# Altium PCB floorctrl.PcbDoc
Units mm, origin at the board's own origin, x right, y up, seen from the top; angles counter-clockwise.
Board outline 60 x 60 mm, 2 copper layers (Top Layer, Bottom Layer), stack 1.571 mm thick; 22 components, 32 nets, 112 pads, 0 vias.
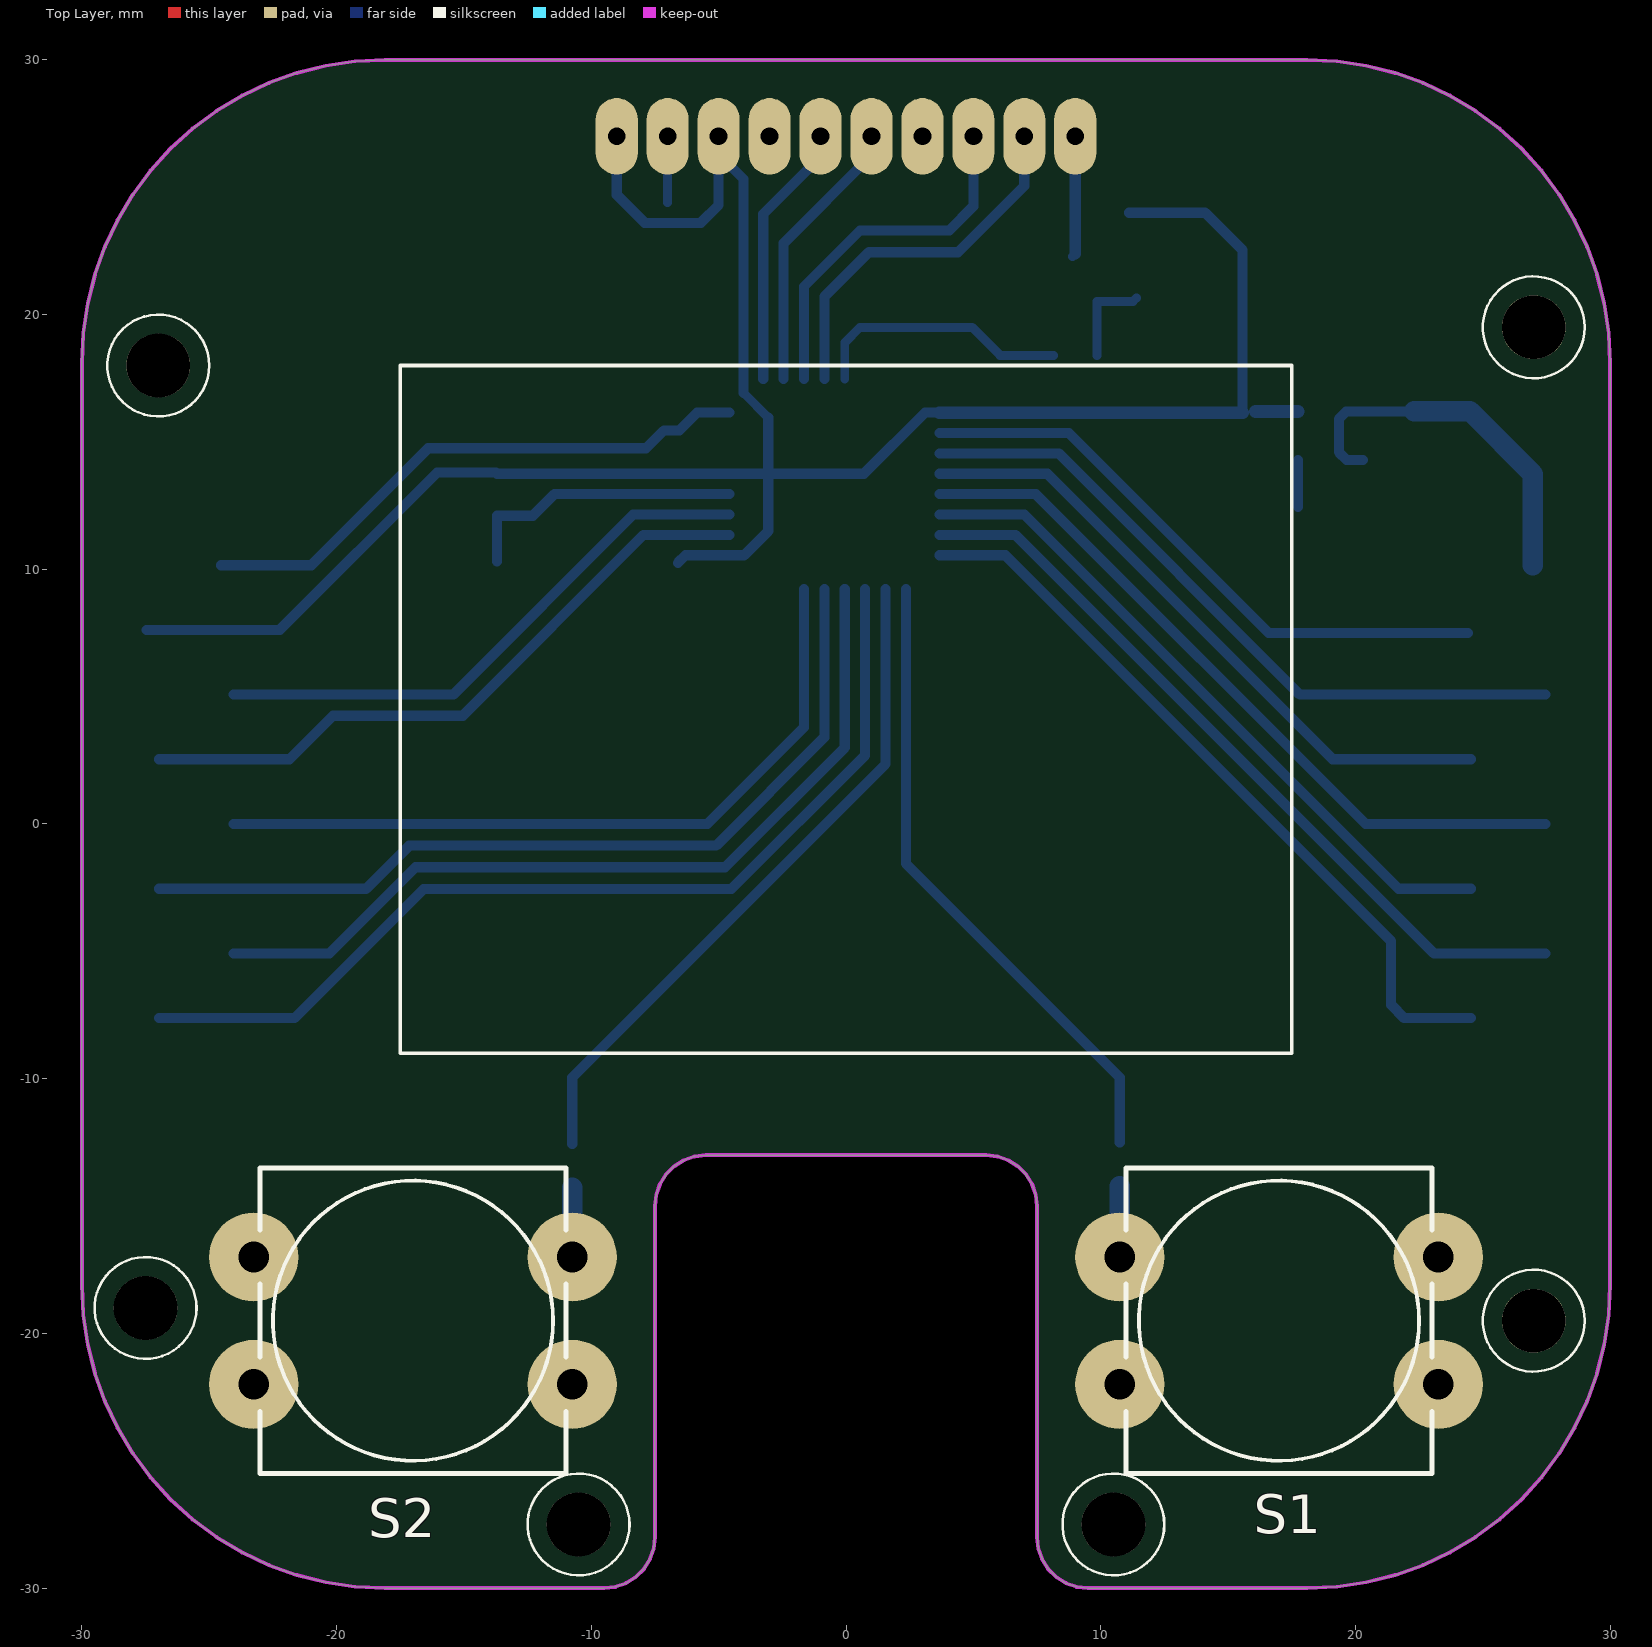
[diagram p0: Top Layer view]
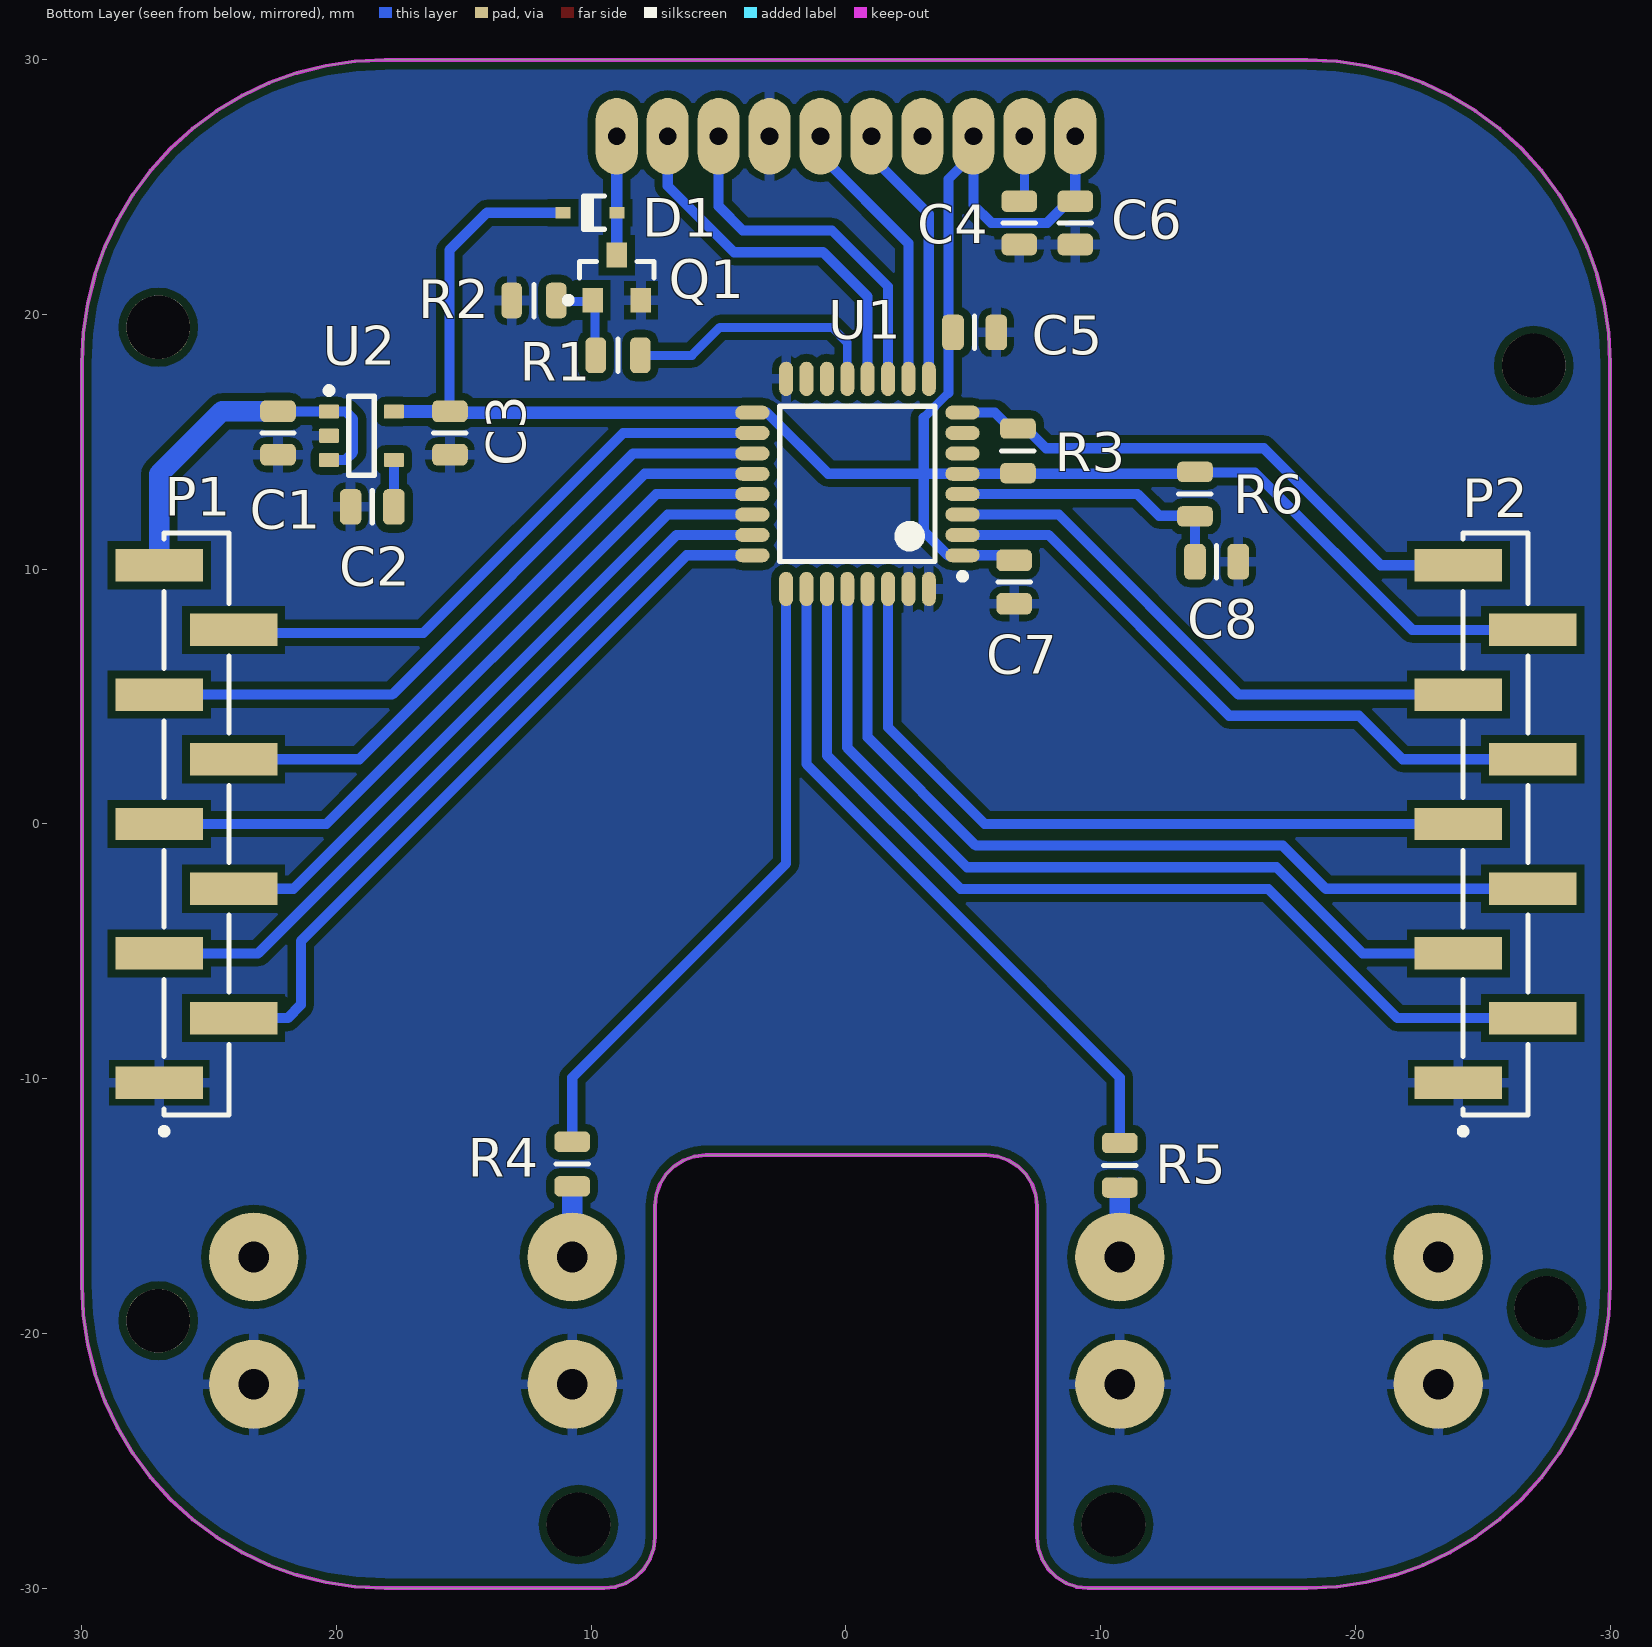
[diagram p1: Bottom Layer view, seen from below]
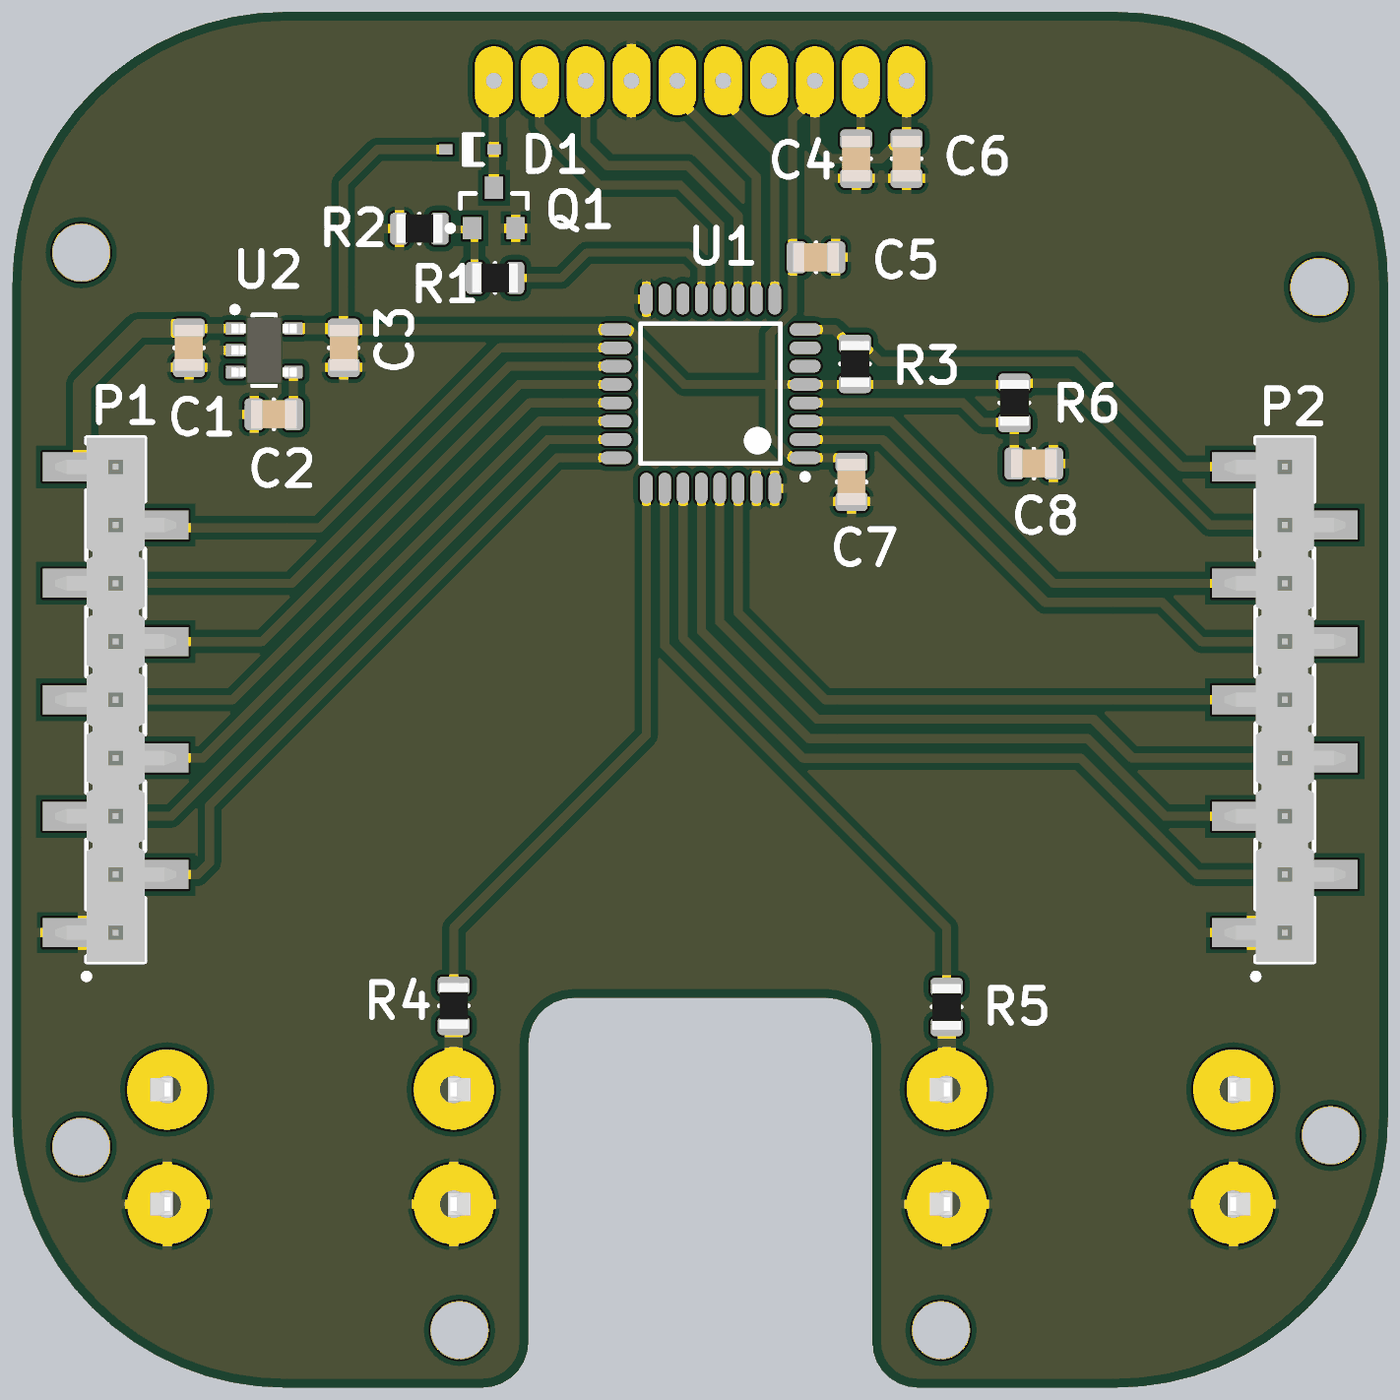
[diagram p2: 3D render of the assembled board from below, using the file's embedded part models]

## Layer stack, top to bottom
Top Solder: solder mask 0.0102, Solder Resist, Dk 3.5
Top Layer: signal copper 0.0356
Dielectric 1: dielectric 1.5, FR-4, Dk 4.8
Bottom Layer: signal copper 0.0356
Bottom Solder: solder mask 0.0102, Solder Resist, Dk 3.5

## Board outline
7.5,-15 7.5,-28 7.55,-28.445 7.698,-28.868 7.936,-29.247 8.253,-29.564 8.632,-29.802 9.055,-29.95 9.5,-30 18.107,-30 19.272,-29.943 20.427,-29.771 21.559,-29.488 22.658,-29.095 23.713,-28.596 24.714,-27.996 25.652,-27.3 26.516,-26.517 27.3,-25.652 27.996,-24.714 28.596,-23.713 29.095,-22.658 29.488,-21.559 29.771,-20.427 29.943,-19.272 30,-18.107 30,18.107 29.943,19.272 29.771,20.427 29.488,21.559 29.095,22.658 28.596,23.713 27.996,24.714 27.3,25.652 26.516,26.516 25.652,27.3 24.714,27.996 23.713,28.596 22.658,29.095 21.559,29.488 20.427,29.771 19.272,29.943 18.107,30 -18.107,30 -19.272,29.943 -20.427,29.771 -21.559,29.488 -22.658,29.095 -23.713,28.596 -24.714,27.996 -25.652,27.3 -26.517,26.516 -27.3,25.652 -27.996,24.714 -28.596,23.713 -29.095,22.658 -29.488,21.559 -29.771,20.427 -29.943,19.272 -30,18.107 -30,-18.107 -29.943,-19.272 -29.771,-20.427 -29.488,-21.559 -29.095,-22.658 -28.596,-23.713 -27.996,-24.714 -27.3,-25.652 -26.517,-26.517 -25.652,-27.3 -24.714,-27.996 -23.713,-28.596 -22.658,-29.095 -21.559,-29.488 -20.427,-29.771 -19.272,-29.943 -18.107,-30 -9.5,-30 -9.055,-29.95 -8.632,-29.802 -8.253,-29.564 -7.936,-29.247 -7.698,-28.868 -7.55,-28.445 -7.5,-28 -7.5,-15 -7.45,-14.555 -7.302,-14.132 -7.064,-13.753 -6.747,-13.436 -6.368,-13.198 -5.945,-13.05 -5.5,-13 5.5,-13 5.945,-13.05 6.368,-13.198 6.747,-13.436 7.064,-13.753 7.302,-14.132 7.45,-14.555

## Design rules (kind name [scope] priority, off if disabled: settings)
Clearance Clearance_1 [IsRegion] p1: gap=0.3 ignorepadtopadclearanceinfootprint=FALSE
Clearance [All] p2: gap=0.2 ignorepadtopadclearanceinfootprint=FALSE
PlaneConnect [All] p1: planeconnectstyle=Relief reliefexpansion=0.508 reliefentries=4 reliefconductorwidth=0.4 reliefairgap=0.254
PolygonConnect [All] p1: connectstyle=Relief reliefconductorwidth=0.4 reliefentries=4 polygonreliefangle="90 Angle" airgapwidth=0.254
RoutingVias [All] p1: holewidth=0.711 width=1.27 viastyle="Through Hole" minholewidth=0.711 minwidth=1.27 maxholewidth=0.711 maxwidth=1.27
SolderMaskExpansion [All] p1: expansion=0.102
Width [All] p1: maxlimit=2 minlimit=0.2 preferedwidth=0.3
29 further rules are at their usual default settings.

## Components (designator, comment, footprint, x,y, rotation, side; value= is the part's Value field where it differs from the comment)
C1 "10uF" CAP0805R 22.3,15.35 r90 bottom
C2 "100nF" CAP0805R 18.6,12.45 r180 bottom
C3 "10uF" CAP0805R 15.55,15.35 r90 bottom
C4 "1uF" CAP0805R -6.8,23.6 r270 bottom
C5 "1uF" CAP0805R -5.05,19.3 r0 bottom
C6 "1uF" CAP0805R -9,23.6 r90 bottom
C7 "1uF" CAP0805R -6.6,9.5 r90 bottom
C8 "1uF" CAP0805R -14.55,10.3 r0 bottom
D1 "BAT42WS-7-F" DIOD-SOD323-2_V 10.05,24 r0 bottom
P1 "TSM-109-01-S-SV" SMTC-TSM-109-01-X-SV 25.5,0 r90 bottom
P2 "TSM-109-01-S-SV" SMTC-TSM-109-01-X-SV -25.5,0 r90 bottom
Q1 "IRLML2502TRPBF" INTR-SOT-23-3_V 9,21.45 r180 bottom
R1 "51" RES0805R 8.95,18.4 r0 bottom
R2 "100k" RES0805R 12.25,20.55 r180 bottom
R3 "4k7" RES0805R -6.75,14.65 r270 bottom
R4 "100" RES0805R 10.75,-13.35 r270 bottom
R5 "100" RES0805R -10.75,-13.4 r90 bottom
R6 "10k" RES0805R -13.7,12.95 r90 bottom
S1 "430476073716" 4304x60737x6_12x12x7.3 17,-19.5 r180 top
S2 "430476073716" 4304x60737x6_12x12x7.3 -17,-19.5 r180 top
U1 "STM32F051K8T6" STM-LQFP32_L -0.45,13.35 r0 bottom
U2 "LP2985IM5-2.8/NOPB" DBV0005A_L 19.022,15.243 r180 bottom

## Footprints (in the part's own frame and the unit in brackets; to place one, negate y for a bottom-side part, rotate by r counter-clockwise, add the part's x,y. Pads: shape width x height; smd on the part's side, far side on the other; paste and mask are expansions set on the pad)
4304x60737x6_12x12x7.3 [mm] "12x12mm washable Tact Switch, THT version"
  round 3.5 hole 1.2: 1(-6.25,2.5) 2(6.25,2.5) 3(-6.25,-2.5) 4(6.25,-2.5)
  silkscreen extent -6,-6 6,6, body extent -6.99,-6 6.99,6, height 7.35
CAP0805R [mm] "capacitor 0805 reflow soldering"
  rrect50% 0.85x1.4 smd: 1(-0.85,0) 2(0.85,0)
  silkscreen extent 0,-0.64 0,0.64, body extent -1,-0.62 1,0.63, height 0.61
DBV0005A_L [mm] "SOT23, 5-Leads, Body 3.05x1.75mm, Pitch 0.95mm, IPC High Density"
  rrect18% 0.8x0.55 smd: 1(-1.275,0.95) 2(-1.275,0) 3(-1.275,-0.95) 4(1.275,-0.95) 5(1.275,0.95)
  silkscreen extent -1.4,-1.55 0.5,1.9, body extent -1.42,-1.46 1.42,1.46, height 1.08
DIOD-SOD323-2_V [mm] "SOD-323, 2-Leads, Body 1.7x1.3mm, Lead Span 2.5mm"
  rect 0.59x0.45 smd: 1(-1.055,0) 2(1.055,0)
  silkscreen extent -0.56,-0.65 0.26,0.65, body extent -0.85,-0.65 0.85,0.65, height 1.2
INTR-SOT-23-3_V [mm] "SOT23, 3-Leads, Body 2.92x1.3mm, Pitch 1.9mm"
  rect 0.802x0.972 smd: 1(-0.95,-0.885) 2(0.95,-0.885) 3(0,0.885)
  silkscreen extent -2.03,-1.01 1.46,0.64, body extent -1.46,-0.65 1.46,0.65, height 1.12
RES0805R [mm] "resistor 0805 reflow soldering"
  rrect50% 0.8x1.4 smd: 1(-0.875,0) 2(0.875,0)
  silkscreen extent 0,-0.64 0,0.64, body extent -1,-0.62 1,0.63, height 0.61
SMTC-TSM-109-01-X-SV [mm] "Single Row SMT Assembly, 9 Pins, Vertical, 2.54mm Pitch, Male"
  rect 1.27x3.43 smd: 1(-10.16,1.46) 2(-7.62,-1.46) 3(-5.08,1.46) 4(-2.54,-1.46) 5(0,1.46) 6(2.54,-1.46) 7(5.08,1.46) 8(7.62,-1.46) 9(10.16,1.46)
  silkscreen extent -12.19,-1.27 11.43,1.4, body extent -11.43,-2.64 11.43,2.64, height 9.65
STM-LQFP32_L [mm] "QFP, 32-Leads, Body 7x7mm, Pitch 0.8mm, IPC High Density"
  oval 1.35x0.55 smd: 1(-4.125,2.8) 2(-4.125,2) 3(-4.125,1.2) 4(-4.125,0.4) 5(-4.125,-0.4) 6(-4.125,-1.2) 7(-4.125,-2) 8(-4.125,-2.8) 17(4.125,-2.8) 18(4.125,-2) 19(4.125,-1.2) 20(4.125,-0.4) 21(4.125,0.4) 22(4.125,1.2) 23(4.125,2) 24(4.125,2.8)
  oval 0.55x1.35 smd: 9(-2.8,-4.125) 10(-2,-4.125) 11(-1.2,-4.125) 12(-0.4,-4.125) 13(0.4,-4.125) 14(1.2,-4.125) 15(2,-4.125) 16(2.8,-4.125) 25(2.8,4.125) 26(2,4.125) 27(1.2,4.125) 28(0.4,4.125) 29(-0.4,4.125) 30(-1.2,4.125) 31(-2,4.125) 32(-2.8,4.125)
  silkscreen extent -4.25,-3.05 3.05,3.75, body extent -3.5,-3.5 3.5,3.5, height 1.6

## Part data
C1 C3: library part CC0805_10UF_16V_10%_X5R, Case=0805, Manufacturer=GENERIC, Manufacturer1 ComponentHeight=1.4mm, Manufacturer1 Example=KEMET, Manufacturer1 Part Number=C0805C106K4PAC, Manufacturer Part Number 2=CC0805KKX5R7BB106, Tolerance=±10%, Voltage=16V, Author="I. Kuznetsov", Component Type=Standard, CreateDate=12/3/2007, HelpURL=\\cern.ch\dfs\Applications\Altium\Datasheets\CC1206_X5R_KEMET.pdf, LatestRevisionDate=12/3/2007, Manufacturer Part Number=CC0805_10UF_16V_10%_X5R, Mounted=Yes, Part Description="SMD Multilayer Chip Ceramic Capacitor", Part Number=CC0805_10UF_16V_10%_X5R, Pin Count=2, SMD=Yes, Socket=No, Status=Preferred, Table="Capacitors SMD", TC=X5R
C2: library part CC0805_100NF_50V_10%_X7R, Case=0805, Manufacturer=GENERIC, Manufacturer1 ComponentHeight=1.35mm, Manufacturer1 Example=EPCOS, Manufacturer1 Part Number=B37941K5104K62, Manufacturer Part Number 2=CC0805KPX7R9BB104, Tolerance=±10%, Voltage=50V, Author="I. Kuznetsov", Component Type=Standard, CreateDate=12/3/2007, HelpURL=\\cern.ch\dfs\Applications\Altium\Datasheets\CC0805_X7R_EPCOS.pdf, LatestRevisionDate=12/3/2007, Manufacturer Part Number=CC0805_100NF_50V_10%_X7R, Mounted=Yes, Part Description="SMD Multilayer Chip Ceramic Capacitor", Part Number=CC0805_100NF_50V_10%_X7R, Pin Count=2, SMD=Yes, Socket=No, Status=Preferred, Table="Capacitors SMD", TC=X7R
C4 C5 C6 C7 C8: library part CC0805_1UF_16V_10%_X7R, Case=0805, Manufacturer=GENERIC, Manufacturer1 ComponentHeight=1.3mm, Manufacturer1 Example=EPCOS, Manufacturer1 Part Number=B37941K9105K062, Manufacturer Part Number 2=CC0805KFX7R7BB105, Tolerance=±10%, Voltage=16V, Author="I. Kuznetsov", Component Type=Standard, CreateDate=12/3/2007, HelpURL=\\cern.ch\dfs\Applications\Altium\Datasheets\CC0805_X7R_EPCOS_HC.pdf, LatestRevisionDate=12/3/2007, Manufacturer Part Number=CC0805_1UF_16V_10%_X7R, Mounted=Yes, Part Description="SMD Multilayer Chip Ceramic Capacitor", Part Number=CC0805_1UF_16V_10%_X7R, Pin Count=2, SMD=Yes, Socket=No, Status=Preferred, Table="Capacitors SMD", TC=X7R
D1: library part CMP-2000-05925-1, "Schottky Barrier Diode, 30 V, -55 to 125 degC, 2-Pin SOD323, RoHS, Tape and Reel", If - Forward Current=0.1A, Ifsm - Forward Surge Current=4A, Ir - Reverse Current=0.5uAat25V, Manufacturer=DiodesIncorporated, Maximum Operating Temperature=+125C, Minimum Operating Temperature=-55C, Operating Temperature Range=-55Cto+125C, Package / Case=SOD-323, Package Description="2-Pin Surface Mount Device, Body 1.7 x 1.3 mm", Package Reference=SOD323-2, Pd - Power Dissipation=200mW, Vf - Forward Voltage=1Vat0.2A, Vrrm - Repetitive Reverse Voltage=30V, Brand=DiodesIncorporated, Configuration=Single, Datasheet URL=http://www.diodes.com/_files/datasheets/ds30100.pdf, Datasheet Version="Rev. 14-2, 06/2012", Factory Pack Quantity=3000, Height=1mm, Length=1.8mm, Manufacturer URL=http://www.diodes.com/, Mounting Style=SMD/SMT, Mounting Technology=SurfaceMount, Package URL=http://www.vishay.com/docs/71192/71192.pdf, Packaging=Reel, Product=SchottkyDiodes, Product Category=SchottkyDiodes&Rectifiers, RoHS=True, Series=BAT42, Technology=Si, Termination Style=SMD/SMT, trr - Reverse Recovery time=5ns, Type=SurfaceMountSchottkyBarrierDiode, Unit Weight=0.000173oz, Width=1.4mm
P1 P2: library part CMP-1024-00278-1, "0.025\" SQ Post Header, Surface Mount, Vertical, -55 to 125 degC, 2.54 mm Pitch, 9-Pin, Male, RoHS", Manufacturer=Samtec, Temperature Range="-55 to 125 degC", ComponentLink1Description="Manufacturer URL", ComponentLink1URL=http://www.samtec.com, ComponentLink2Description=Datasheet, ComponentLink2URL=http://www.samtec.com/documents/webfiles/pdf/TSM.PDF, ComponentLink3Description="Package Specification", ComponentLink3URL=http://www.samtec.com/documents/webfiles/cpdf/TSM-1XX-XX-XXX-SV-XX-XXX-XX-MKT.pdf, DatasheetVersion=F-214, Mounting Technology="Surface Mount", Orientation=Vertical, PackageDescription="Single Row .100 SMT Assembly", PackageReference=TSM-109-01-X-SV, PackageVersion="BP, 8/2002", PartNumber=TSM-109-01-S-SV, Pitch="2.54 mm", RoHS=True
Q1: library part CMP-2000-04985-1, "N-Channel HEXFET(R) Power MOSFET, 20 V VDS, +/- 12 V VGS, 4.2 A, 3-Pin SOT23, RoHS, Tape and Reel", Drain-Source On Resistance-Max=0.045O, Drain-to-Source Voltage [Vdss]=20V, Manufacturer="International Rectifier", Package Description="3-Pin Small Outline Transistor, Body 2.92 x 1.3 mm, Pitch 0.95 mm", Package Reference=SOT-23-3, Rated Power Dissipation=1.25W, Channel Type=N-Channel, Datasheet URL=https://datasheet.ciiva.com/6383/irlml2502pbf-6383216.pdf, Datasheet Version=Apr-14, Manufacturer URL=http://internationalrectifier.com/, Qg Gate Charge=8nC
R1: library part R0805_51R_1%_0.125W_100PPM, Case=0805, Manufacturer=GENERIC, Manufacturer1 ComponentHeight=0.6mm, Manufacturer1 Example="NIC COMPONENT", Manufacturer1 Part Number=NRC10F51R0TRF, Power=0.125W, Tolerance=±1%, Author="CERN DEM JLC", Component Type=Standard, CreateDate=12/3/2007, HelpURL=\\cern.ch\dfs\Applications\Altium\Datasheets\R0805_NIC_NRC.pdf, LatestRevisionDate=3/13/2008, Manufacturer Part Number=R0805_51R_1%_0.125W_100PPM, Mounted=Yes, PackageDescription=Standard, Part Description="General Purpose Thick Film Chip Resistor", Part Number=R0805_51R_1%_0.125W_100PPM, Pin Count=2, SMD=Yes, Socket=No, Status=Preferred, Table="Resistors SMD", TC=±100ppm/°C
R2: library part R0805_100K_1%_0.125W_100PPM, Case=0805, Manufacturer=GENERIC, Manufacturer1 ComponentHeight=0.6mm, Manufacturer1 Example="NIC COMPONENT", Manufacturer1 Part Number=NRC10F1003TRF, Power=0.125W, Tolerance=±1%, Author="CERN DEM JLC", Component Type=Standard, CreateDate=12/3/2007, HelpURL=\\cern.ch\dfs\Applications\Altium\Datasheets\R0805_NIC_NRC.pdf, LatestRevisionDate=3/13/2008, Manufacturer Part Number=R0805_100K_1%_0.125W_100PPM, Mounted=Yes, PackageDescription=Standard, Part Description="General Purpose Thick Film Chip Resistor", Part Number=R0805_100K_1%_0.125W_100PPM, Pin Count=2, SMD=Yes, Socket=No, Status=Preferred, Table="Resistors SMD", TC=±100ppm/°C
R3: library part R0805_4K7_1%_0.125W_100PPM, Case=0805, Manufacturer=GENERIC, Manufacturer1 ComponentHeight=0.6mm, Manufacturer1 Example="NIC COMPONENT", Manufacturer1 Part Number=NRC10F4701TRF, Power=0.125W, Tolerance=±1%, Author="CERN DEM JLC", Component Type=Standard, CreateDate=12/3/2007, HelpURL=\\cern.ch\dfs\Applications\Altium\Datasheets\R0805_NIC_NRC.pdf, LatestRevisionDate=3/13/2008, Manufacturer Part Number=R0805_4K7_1%_0.125W_100PPM, Mounted=Yes, PackageDescription=Standard, Part Description="General Purpose Thick Film Chip Resistor", Part Number=R0805_4K7_1%_0.125W_100PPM, Pin Count=2, SMD=Yes, Socket=No, Status=Preferred, Table="Resistors SMD", TC=±100ppm/°C
R4 R5: library part R0805_100R_1%_0.125W_100PPM, Case=0805, Manufacturer=GENERIC, Manufacturer1 ComponentHeight=0.6mm, Manufacturer1 Example="NIC COMPONENT", Manufacturer1 Part Number=NRC10F4700TRF, Power=0.125W, Tolerance=±1%, Author="CERN DEM JLC", Component Type=Standard, CreateDate=12/3/2007, HelpURL=\\cern.ch\dfs\Applications\Altium\Datasheets\R0805_NIC_NRC.pdf, LatestRevisionDate=3/13/2008, Manufacturer Part Number=R0805_100R_1%_0.125W_100PPM, Mounted=Yes, PackageDescription=Standard, Part Description="General Purpose Thick Film Chip Resistor", Part Number=R0805_100R_1%_0.125W_100PPM, Pin Count=2, SMD=Yes, Socket=No, Status=Preferred, Table="Resistors SMD", TC=±100ppm/°C
R6: library part R0805_10K_1%_0.125W_100PPM, Case=0805, Manufacturer=GENERIC, Manufacturer1 ComponentHeight=0.6mm, Manufacturer1 Example="NIC COMPONENT", Manufacturer1 Part Number=NRC10F1002TRF, Power=0.125W, Tolerance=±1%, Author="CERN DEM JLC", Component Type=Standard, CreateDate=12/3/2007, HelpURL=\\cern.ch\dfs\Applications\Altium\Datasheets\R0805_NIC_NRC.pdf, LatestRevisionDate=3/13/2008, Manufacturer Part Number=R0805_10K_1%_0.125W_100PPM, Mounted=Yes, PackageDescription=Standard, Part Description="General Purpose Thick Film Chip Resistor", Part Number=R0805_10K_1%_0.125W_100PPM, Pin Count=2, SMD=Yes, Socket=No, Status=Preferred, Table="Resistors SMD", TC=±100ppm/°C
S1 S2: "WS-TATV 12x12mm washable Tact Switch, THT version", ComponentLink1Description=Manufacturer, ComponentLink1URL=http://www.we-online.de, ComponentLink2Description=Datasheet, ComponentLink2URL=http://katalog.we-online.de/em/datasheet/4304x60737x6.pdf, Life Cycle="500000 cycles", Operation Force=160g, Part Number=430476073716, Published Date="June 2017", Publisher="Wurth Elektronik", Size="12x12x7.3 mm"
U1: library part CMP-0304-00021-1, "ARM Cortex-M0 32-bit MCU, 64 KB Flash, 8 KB Internal RAM, 25 I/Os, 32-pin LQFP, -40 to 85 degC, Tray", I/Os (High Current)=25, Operating Frequency(F) (Processor speed) (MHz)=48, Supply Voltage(Vcc) min (V)=2, ComponentLink1Description="Manufacturer URL", ComponentLink1URL=http://www.st.com/web/en/home.html, ComponentLink2Description=Datasheet, ComponentLink2URL=http://www.st.com/st-web-ui/static/active/en/resource/technical/document/datasheet/DM00039193.pdf, ComponentLink3Description="Package Specification", ComponentLink3URL=http://www.st.com/st-web-ui/static/active/en/resource/technical/document/datasheet/DM00088500.pdf, Core="ARM Cortex-M0", DatasheetVersion="Rev. 3", FLASH Size (Prog) (kB)=64, Internal RAM Size (kB)=8, Mounting Technology="Surface Mount", PackageDescription="32-Pin Low Profile Quad Flat Package, 7 x 7 mm Body, 0.8 mm Pitch", PackageReference=LQFP32, PackageVersion="Rev. 1, 07/2013", Packing=Tray, PartNumber=STM32F051K8T6
U2: library part CMP-0062-01978-3, "Micropower 150 mA Low-Noise Ultra Low-Dropout Regulator, 5-pin SOT-23, Pb-Free", Manufacturer="Texas Instruments", PackageTopMarking=L0KB*XTT, PowerWise=N, ComponentLink1Description="Datasheet URL", ComponentLink1URL=http://www.ti.com/general/docs/lit/getliterature.tsp?genericPartNumber=LP2985-N&fileType=pdf, CompType="LDO IC", PackageDescription="Molded SOT-23, .115 x .063 x .040 in Body, 5 Lead, .0375 in Pitch", PackageReference=DBV0005A, PinCount=5, RoHS=Y

## Free pads (board coordinates)
  oval 1.65x3 hole 0.7: 1V8(-3,27) 2V8(-5,27) LCD_A(-9,27) LCD_CHP(-7,27) LCD_CLK(-1,27) LCD_CS(5,27) LCD_GND(3,27) LCD_RST(7,27) LCD_SDA(1,27) LED-(9,27)
  round 2.5 hole 2.5: 8(-27,18) 9(-27.5,-19) 9(-10.5,-27.5) 9(10.5,-27.5) 10(27,-19.5) 11(27,19.5)

## Nets (pads, with @x,y where several pads share a name; then routed paths per layer and width w, separated by ;. In a path a pad name is that pad's centre, name@x,y a point inside that pad or via, vN(x,y) a via of type N, cw(c..) or ccw(c..) an arc to the next point about the centre after c; other vN are vias at no path point)
2V8: C3.2 C5.2 C6.2 C7.2 D1.2 P2.8 pad.2V8 pad.LCD_A R3.2 R6.2 U1.1 U1.5 U1.17 U2.5 | length 90.6
  Bottom Layer w0.35: -4.025,16.925 -3.05,15.95
  Bottom Layer w0.4: P2.8@-27.46,7.62 P2.8 -22.23,7.62 -16.05,13.8 -13.75,13.8 -13.7,13.75 U1.5 -3.05,13.75 ; pad.LCD_A@-9,27.75 pad.LCD_A -9,24.706 -9.003,24.703 -7.9,23.6 -5.7,23.6 -5,24.3 pad.2V8@-5,26.3 ; C7.2@-6.6,10.25 -6.3,10.55 U1.1 -4,10.55 -3.05,11.5 -3.05,13.75 ; pad.2V8@-5,27.7 pad.2V8 pad.2V8@-5,26.3 ; -4.025,16.925 -4.025,25.325 pad.2V8@-5,26.3 ; -3.05,15.95 -3.05,13.75 ; U1.17 3.1,16.15 0.7,13.75 -3.05,13.75 ; D1.2 14.1,24 15.572,22.528 15.572,16.143 C3.2@15.565,16.15
  Bottom Layer w0.5: U1.17 C3.2@15.565,16.15 ; C3.2@16.072,16.193 U2.5
5V1: C1.2 P1.9 U2.1 U2.3 | length 14.4
  Bottom Layer w0.4: U2.3 19.657,14.293 19.35,14.6 19.35,15.9 19.643,16.193 U2.1 C1.2@21.972,16.193
  Bottom Layer w0.8: C1.2 24.5,16.2 26.96,13.74 P1.9
BL_PWM: R1.1 U1.13 | length 10.3
  Bottom Layer w0.35: U1.13 -0.05,18.9 0.55,19.5 4.95,19.5 6.05,18.4 R1.1@8.15,18.4
BUT1: R4.1 U1.25 | length 25.2
  Bottom Layer w0.4: U1.25 2.35,-1.55 10.75,-9.95 R4.1@10.75,-12.5
BUT2: R5.2 U1.26 | length 26.9
  Bottom Layer w0.4: R5.2@-10.75,-12.55 -10.75,-9.95 1.55,2.35 U1.26
GND: C1.1 C2.1 C3.1 C4.2 C5.1 C6.1 C7.1 C8.1 P1.1 P2.1 pad.LCD_GND Q1.2 R2.1 S1.1 S1.2 S2.1 S2.2 U1.16 U1.31 U1.32 U2.2
LCD_CHP: C4.1 pad.LCD_CHP | length 2.6
  Bottom Layer w0.35: C4.1@-7,24.4 pad.LCD_CHP
LCD_CLK: pad.LCD_CLK U1.9 | length 10.5
  Bottom Layer w0.4: U1.9 -3.25,23.95 -1,26.2 pad.LCD_CLK
LCD_CS: pad.LCD_CS U1.11 | length 14.3
  Bottom Layer w0.4: U1.11 -1.65,21.1 0.55,23.3 4.05,23.3 5,24.25 pad.LCD_CS
LCD_RST: pad.LCD_RST U1.12 | length 14.8
  Bottom Layer w0.4: U1.12 -0.85,20.7 0.9,22.45 4.4,22.45 7,25.05 pad.LCD_RST
LCD_SDA: pad.LCD_SDA U1.10 | length 11
  Bottom Layer w0.4: U1.10 -2.45,22.8 1,26.25 pad.LCD_SDA
LED-: D1.1 pad.LED- Q1.3 | length 4.8
  Bottom Layer w0.35: Q1.3@8.9,22.285 Q1.3@9,22.385
  Bottom Layer w0.45: Q1.3@9,22.385 pad.LED-
NetC2_2: C2.2 U2.4 | length 1.8
  Bottom Layer w0.4: U2.4 17.747,12.453 C2.2
NetQ1_1: Q1.1 R1.2 R2.2 | length 3.7
  Bottom Layer w0.35: R1.2@9.85,18.4 9.85,20.515 11.265,20.515 R2.2@11.4,20.65
NetR4_2: R4.2 S1.4 | length 2.8
  Bottom Layer w0.8: S1.4 R4.2
NetR5_1: R5.1 S2.3 | length 2.7
  Bottom Layer w0.8: S2.3 R5.1
NRST: C8.2 R6.1 U1.4 | length 11.3
  Bottom Layer w0.4: C8.2 -13.7,12.1 -12.3,12.1 -11.45,12.95 U1.4
ONEWIRE: P2.9 R3.1 U1.8 | length 22.4
  Bottom Layer w0.4: P2.9@-24.54,10.16 P2.9 -20.99,10.16 -16.4,14.75 -7.85,14.75 -7.15,15.45 -6.55,15.45 -5.85,16.15 U1.8
PA1: U1.7
PA10: P1.6 U1.20 | length 25.5
  Bottom Layer w0.4: U1.20 7.9,13.75 19.11,2.54 P1.6 P1.6@24.54,2.54
PA11: P1.5 U1.21 | length 29.1
  Bottom Layer w0.4: U1.21 7.45,12.95 20.4,0 P1.5@27.46,0
PA12: P1.4 U1.22 | length 26.9
  Bottom Layer w0.4: U1.22 7,12.15 21.69,-2.54 P1.4 P1.4@24.54,-2.54
PB4: P2.2 U1.27 | length 38.5
  Bottom Layer w0.4: P2.2 -21.65,-7.62 -16.58,-2.55 -4.5,-2.55 0.75,2.7 U1.27
PB5: P2.3 U1.28 | length 33.6
  Bottom Layer w0.4: P2.3 -20.28,-5.08 -16.9,-1.7 -4.75,-1.7 -0.05,3 U1.28
PB6: P2.4 U1.29 | length 34.4
  Bottom Layer w0.4: P2.4 -18.84,-2.54 -17.15,-0.85 -5.1,-0.85 -0.85,3.4 U1.29
PB7: P2.5 U1.30 | length 29.4
  Bottom Layer w0.4: P2.5 -5.45,0 -1.65,3.8 U1.30
PF0: P2.6 U1.2 | length 26
  Bottom Layer w0.4: P2.6 -21.85,2.54 -20.14,4.25 -15.05,4.25 -7.95,11.35 U1.2
PF1: P2.7 U1.3 | length 22.4
  Bottom Layer w0.4: P2.7 -15.42,5.08 -8.35,12.15 U1.3
SWCK: P1.2 U1.24 | length 29.9
  Bottom Layer w0.4: U1.24 6.25,10.55 21.4,-4.6 21.4,-7.1 21.92,-7.62 P1.2 P1.2@24.54,-7.62
SWDAT: P1.3 U1.23 | length 30.6
  Bottom Layer w0.4: U1.23 6.65,11.35 23.08,-5.08 P1.3 P1.3@27.46,-5.08
TRI_OUT: P1.8 U1.18 | length 24
  Bottom Layer w0.4: U1.18 8.75,15.35 16.6,7.5 P1.8@24.42,7.5
ZC_IN: P1.7 U1.19 | length 27.7
  Bottom Layer w0.4: U1.19 8.35,14.55 17.82,5.08 P1.7 P1.7@27.46,5.08
pads on no net: S1.3 S2.4 U1.6 U1.14 U1.15

## Polygon pours and split planes (outlines as drawn)
GND on Bottom Layer "Bottom Layer-GND" (solid, remove dead copper, pour order 0): -31,31 31,31 31,-31 -31,-31

## Keep-outs
Keep-Out Layer:
  the board outline again, w0.15

## Silkscreen, mask and mechanical layers (free items; w line width, h text height)
Top Overlay:
  circle w0.1: c-10.5,-27.5 r2
  circle w0.1: c10.5,-27.5 r2
  circle w0.1: c27,-19.5 r2
  circle w0.1: c27,19.5 r2
  circle w0.1: c-27,18 r2
  circle w0.1: c-27.5,-19 r2
  circle w0.15: c17,-19.5 r5.5
  circle w0.15: c-17,-19.5 r5.5
  lines w0.15: -17.5,-9 17.5,-9 17.5,18 -17.5,18 -17.5,-9